# EAGLE board Adafruit ADS1015 ADC STEMMA QT (EAGLE 9.6.2)
REV: C
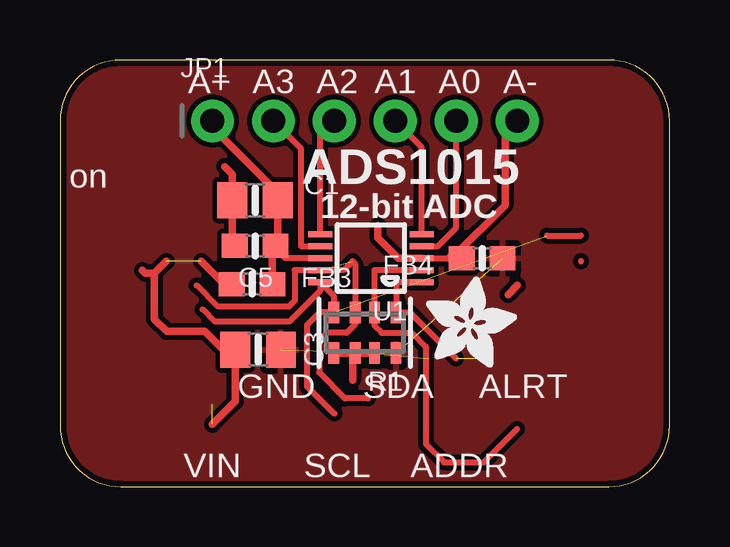
[diagram p0: board, top side]
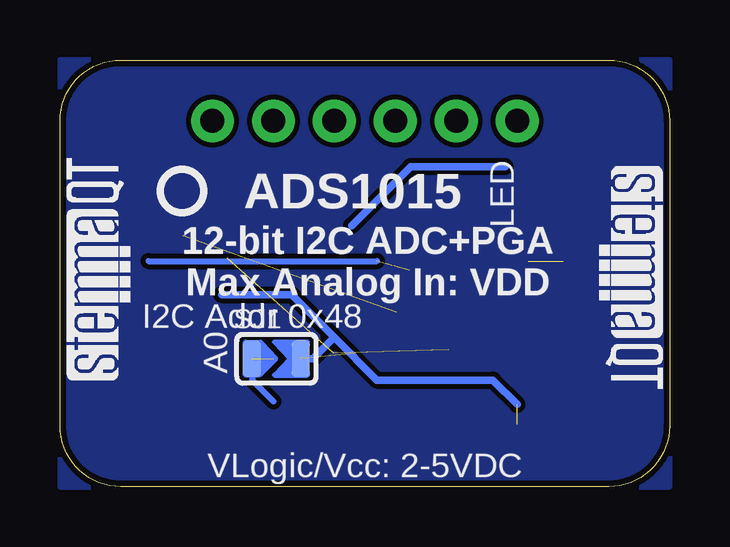
[diagram p1: board, bottom side, seen from below]

Size 25.4 x 17.78 mm. Coordinates in mm from the lower left corner, seen from the top.
Outline: 0,15.24 0,2.54 arc90 2.54,0 22.86,0 arc90 25.4,2.54 25.4,15.24 arc90 22.86,17.78 2.54,17.78 arc90 0,15.24
Copper layers (1*16): Top 0.035mm / dielectric 1.5mm / Bottom 0.035mm
Design rules "adafruit 7-7": minimum track width 6mil, minimum drill 15.5mil, track to track 8mil, track to pad 7mil, pad to pad 7mil, via to via 7mil, smd to smd 7mil, copper to edge 10mil, drill to drill 8mil, minimum pad ring 10mil, minimum via ring 8mil, stop-mask expansion 2mil, vias tented up to drill 20mil, thermal gap 10mil
Net classes: 1 highpower: width 0.305 mm, drill 0.483 mm; 2 lowpower: width 0.254 mm, drill 0.483 mm

## Footprints (pad centres in the part's own frame; a part is rotated, then mirrored left to right if it is on the bottom)
0805-NO = smd 1.24 x 1.5: 1 -0.95,0; 2 0.95,0
0603-NO = smd 1.075 x 1: 1 -0.85,0; 2 0.85,0
1X06_ROUND_70 = drill 1 pad 1.778: 1 -6.35,0; 2 -3.81,0; 3 -1.27,0; 4 1.27,0; 5 3.81,0; 6 6.35,0
RESPACK_4X0603 = smd 0.45 x 0.9: 1 -1.3,-0.85; 2 -0.4,-0.85; 3 0.4,-0.85; 4 1.3,-0.85; 5 1.3,0.85; 6 0.4,0.85; 7 -0.4,0.85; 8 -1.3,0.85
SOLDERJUMPER_ARROW_NOPASTE = smd 0.762 x 1.524: 1 -1.016,0; 2 1.016,0
MSOP10 = smd 0.25 x 1: 1 -1,-2.113; 2 -0.5,-2.113; 3 0,-2.113; 4 0.5,-2.113; 5 1,-2.113; 6 1,2.113; 7 0.5,2.113; 8 0,2.113; 9 -0.5,2.113; 10 -1,2.113

## Placement (x,y rotation side)
C1  10µF  [0805-NO]  8.13,11.94 0 top
C3  10uF  [0805-NO]  8.26,5.71 0 top
C5  0.1uF  [0603-NO]  8.13,10.03 180 top
FB3  FERRITE  [0603-NO]  8,8.45 0 top
FB4  FERRITE  [0603-NO]  17.59,9.53 180 top
JP1  [1X06_ROUND_70]  12.7,15.24 0 top
R1  10K  [RESPACK_4X0603]  12.7,6.41 180 top
SJ1  [SOLDERJUMPER_ARROW_NOPASTE]  16.38,5.33 0 bottom
U1  ADS1015IDGST  [MSOP10]  12.95,9.53 90 top
U$32  [ADAFRUIT_3.5MM]  15.24,4.95 0 top
U$33  [PCBFEAT-REV-040]  20.32,12.32 0 bottom
U$34  [STEMMAQT]  22.48,4.45 90 bottom
U$35  [STEMMAQT]  2.92,13.34 270 bottom

## Library data of the parts
C1 C3 C5 FB3 FB4 JP1 R1 U1 U$32 U$33 = microbuilder
SJ1 = microbuilder; BOM: EXCLUDE
U$34 U$35 = silks

## Nets
ADDR: R1.1 SJ1.1 U1.1
AGND: C1.1 C5.2 FB4.2 JP1.6 U1.3
AIN0: JP1.5 U1.4
AIN1: JP1.4 U1.5
AIN2: JP1.3 U1.6
AIN3: JP1.2 U1.7
ALERT: R1.2 U1.2
AVDD: C1.2 C5.1 FB3.2 JP1.1 U1.8
GND: C3.2 FB4.1 R1.8
SCL: R1.4 U1.10
SDA: R1.3 U1.9
VCC [highpower]: C3.1 FB3.1 R1.5 R1.6 R1.7 SJ1.2

## Tracks (layer width: path | path; a pad name or v marks a point on that pad's centre or on a via)
ADDR  (1 unrouted)
  Top 0.254: U1.1 14,8.53 R1.1 14.58,7.26 16.51,5.33
  Bottom 0.254: SJ1.1 17.4,4.45 16.51,3.56
AGND  (2 unrouted)
  Top 0.254: U1.3 16.21,9.53 | 16.34,9.65 16.43,9.62 FB4.2
  Top 0.305: C5.2 7.18,10.13 C1.1 7.18,13.02 6.86,13.34 | JP1.6 18.54,14.73 18.54,11.73 16.43,9.62 | 16.34,9.65 16.21,9.53 | 13.25,10.88 13.25,10.37 14.1,9.53 U1.3
  Bottom 0.305: 6.86,13.34 10.79,13.34 13.25,10.88
AIN0
  Top 0.254: U1.4 15.74,10.03 16.51,10.79 JP1.5
AIN1
  Top 0.254: U1.5 15.07,14.14 JP1.4
AIN2
  Top 0.254: U1.6 10.84,14.65 JP1.3
AIN3
  Top 0.254: JP1.2 10.03,14.1 10.03,10.03 U1.7
ALERT
  Top 0.254: U1.2 13.1,9.03 R1.2 13.1,6.71 13.4,6.41 14.67,6.41 15.24,5.84 15.24,1.78 16,1.02 17.65,1.02 19.05,2.41
AVDD
  Top 0.254: U1.8 9.38,9.53 8.98,9.93 C5.1
  Top 0.305: FB3.2 8.85,9.91 C5.1 9.08,10.13 C1.2 9.08,12.26 6.35,14.99 JP1.1
GND  (2 unrouted)
  pour Top: 0,17.78 25.4,17.78 25.4,0 0,0
  pour Bottom: 0,17.78 25.4,17.78 25.4,0 0,0
SCL  (1 unrouted)
  Top 0.254: 5.94,7.39 6.45,6.88 9.56,6.88 10.84,8.16 U1.10 11.4,7.97 R1.4 10.82,7.26 10.29,6.73 10.29,4.19 11.43,3.05 | 20.29,10.46 21.72,10.46
SDA  (2 unrouted)
  Top 0.254: 12.83,3.68 11.87,3.68 10.79,4.76 10.79,6.1 11.11,6.41 11.94,6.41 12.3,6.78 R1.3 12.3,9.29 12.19,9.4 11.82,9.03 U1.9 9.78,9.03 9.78,7.75 9.53,7.5 6.58,7.5 5.69,8.39 | 21.71,9.39 21.72,9.4
  Bottom 0.254: 21.72,9.4 12.19,9.4
VCC  (4 unrouted)
  Top 0.305: 6.35,2.6 7.3,3.56 C3.1 6.8,5.71 6.04,6.48 4.45,6.48 3.94,6.99 3.94,8.89 | R1.5 R1.6 | R1.6 R1.7 | 5.89,9.39 6.83,8.45 FB3.1 | R1.6 12.19,5.46 12.19,4.45 | 19.06,8.39 18.67,8 | 4.44,9.39 3.94,8.89 | 3.43,9.02 3.56,8.89 3.94,8.89
  Bottom 0.305: 6.35,3.43 7.37,4.45 12.19,4.45 13.97,6.22 | 18.67,8 15.75,8 13.97,6.22 | SJ1.2 14.86,5.33 13.97,6.22

## Text on the board
tPlace: A+ | A3 | A2 | A1 | A0 | A- | ADS1015 | on | 12-bit ADC | GND | SDA | ALRT | VIN | SCL | ADDR
bPlace: LED | ADS1015 | 12-bit I2C ADC+PGA / Max Analog In: VDD | I2C Addr 0x48 | A0 | VLogic/Vcc: 2-5VDC